# Altium PCB PCB1.PcbDoc
Units mil, origin at the board's own origin, x right, y up, seen from the top; angles counter-clockwise.
Board outline 5720 x 4000 mil, 2 copper layers (Top Layer, Bottom Layer); 32 components, 35 nets, 157 pads, 32 vias.
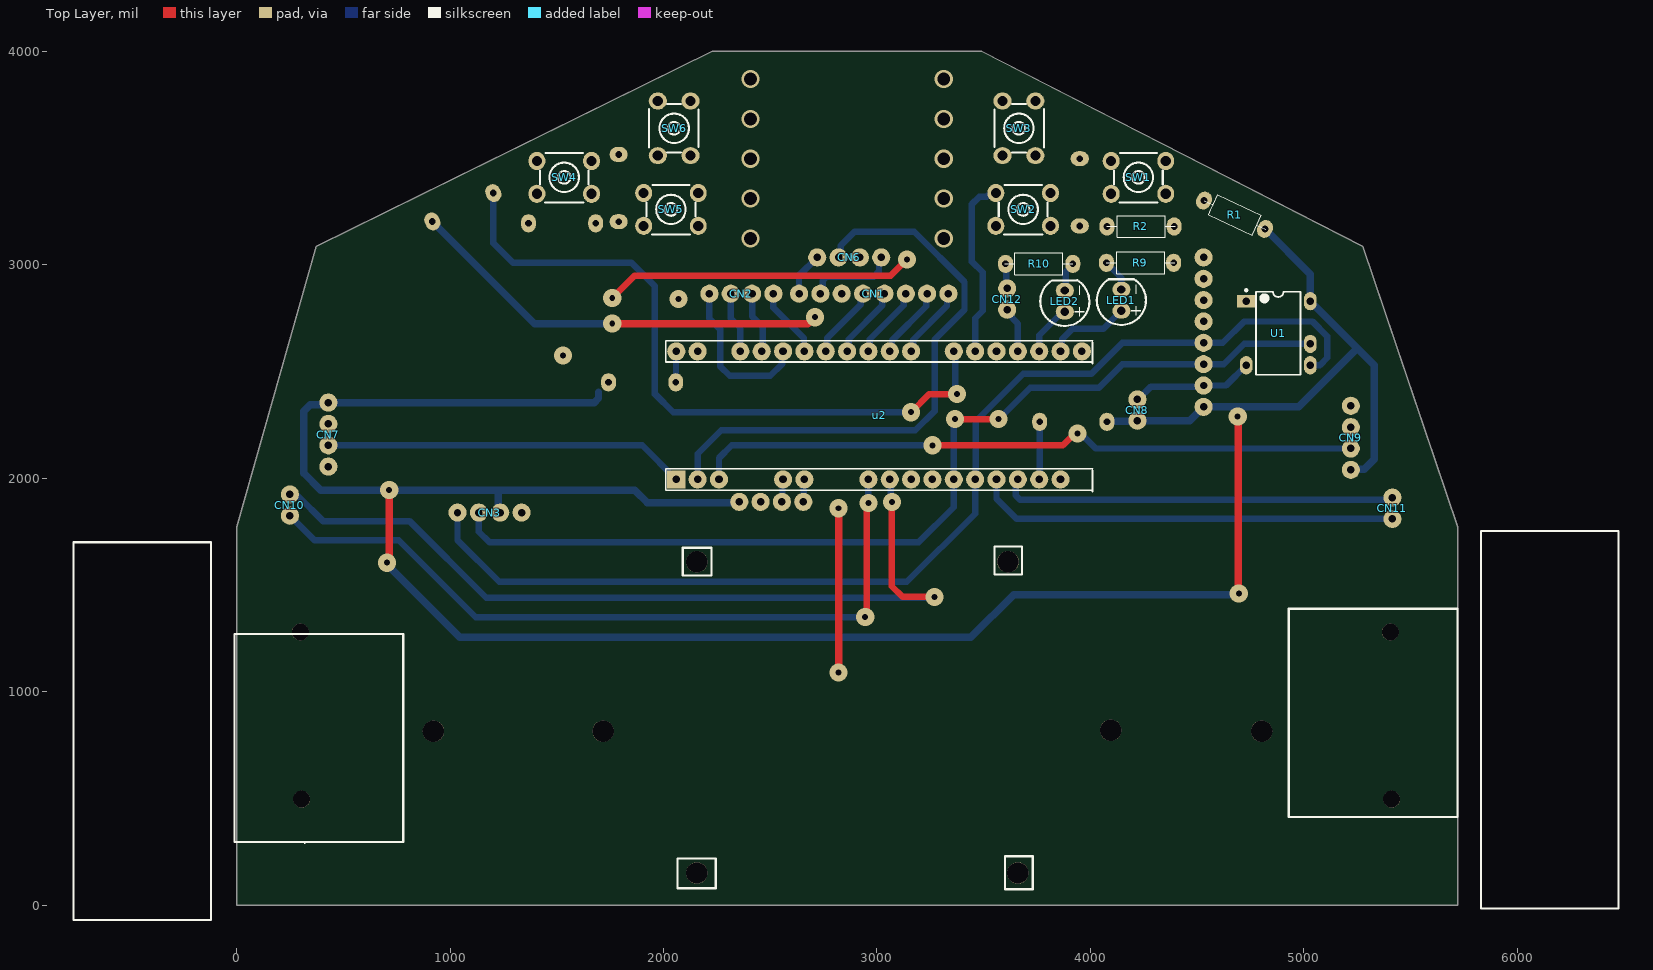
[diagram p0: Top Layer view]
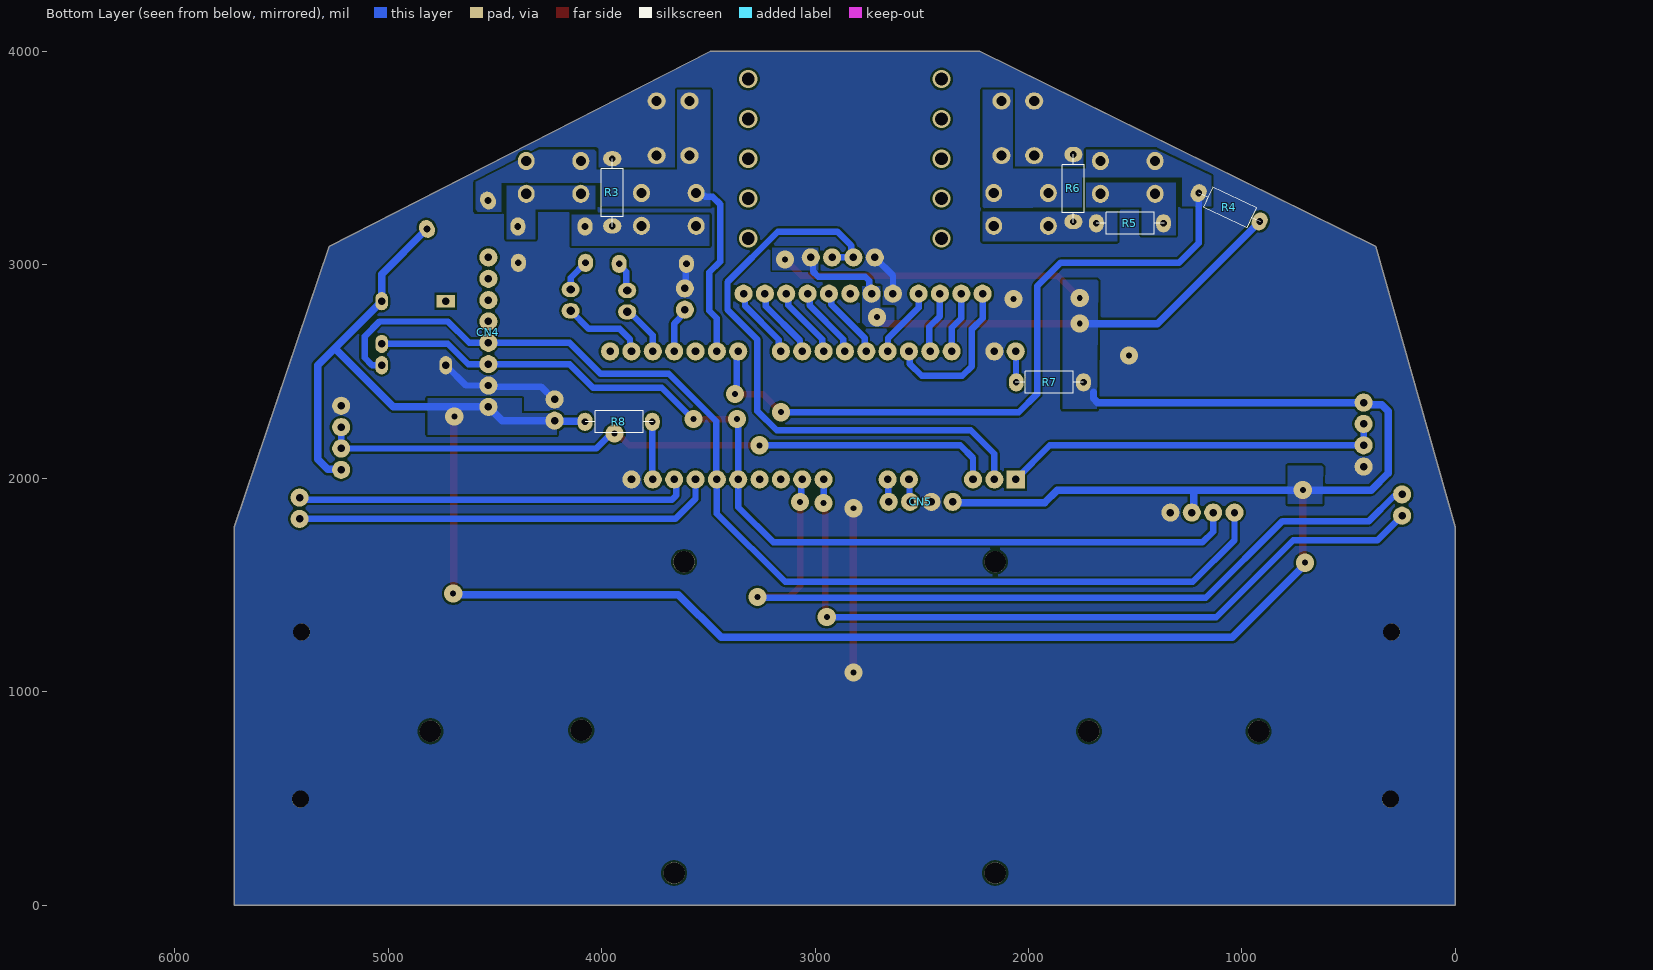
[diagram p1: Bottom Layer view, seen from below]

## Layer stack, top to bottom
Top Solder: solder mask 0.4, Solder Resist, Dk 3.5
Top Layer: signal copper 1.4
Dielectric 1: dielectric 12.6, FR-4, Dk 4.8
Bottom Layer: signal copper 1.4
Bottom Solder: solder mask 0.4, Solder Resist, Dk 3.5

## Board outline
0,0 5720,0 5720,1771.65 5275.59,3087.76 3491.65,4000 2228.35,4000 373.56,3087.76 0,1771.65

## Design rules (kind name [scope] priority, off if disabled: settings)
Clearance Clearance_1 [InNamedPolygon('GND_01')] p1: gap=10 ignorepadtopadclearanceinfootprint=FALSE
Clearance [All] p2: gap=10 ignorepadtopadclearanceinfootprint=FALSE
PolygonConnect PolygonConnect_21 [All vs IsNamedPolygon('NONET_L-01_P-001')] p1: thpad.connectstyle=Direct thpad.reliefconductorwidth=10 thpad.reliefentries=4 thpad.polygonreliefangle="90 Angle" thpad.airgapwidth=10 smdpad.connectstyle=Relief smdpad.reliefconductorwidth=10 smdpad.reliefentries=4 smdpad.polygonreliefangle="90 Angle" smdpad.airgapwidth=10 via.connectstyle=Direct via.reliefconductorwidth=10 via.reliefentries=4 via.polygonreliefangle="90 Angle" via.airgapwidth=10
PolygonConnect PolygonConnect_20 [All vs IsNamedPolygon('GND_01')] p2: thpad.connectstyle=Direct thpad.reliefconductorwidth=10 thpad.reliefentries=4 thpad.polygonreliefangle="90 Angle" thpad.airgapwidth=10 smdpad.connectstyle=Relief smdpad.reliefconductorwidth=10 smdpad.reliefentries=4 smdpad.polygonreliefangle="90 Angle" smdpad.airgapwidth=10 via.connectstyle=Direct via.reliefconductorwidth=10 via.reliefentries=4 via.polygonreliefangle="90 Angle" via.airgapwidth=10
PolygonConnect PolygonConnect_19 [All vs IsNamedPolygon('NONET_L-01_P-001')] p3: thpad.connectstyle=Direct thpad.reliefconductorwidth=10 thpad.reliefentries=4 thpad.polygonreliefangle="90 Angle" thpad.airgapwidth=10 smdpad.connectstyle=Relief smdpad.reliefconductorwidth=10 smdpad.reliefentries=4 smdpad.polygonreliefangle="90 Angle" smdpad.airgapwidth=10 via.connectstyle=Relief via.reliefconductorwidth=10 via.reliefentries=4 via.polygonreliefangle="90 Angle" via.airgapwidth=10
PolygonConnect PolygonConnect_18 [All vs IsNamedPolygon('NONET_L-01_P-001')] p4: thpad.connectstyle=Direct thpad.reliefconductorwidth=10 thpad.reliefentries=4 thpad.polygonreliefangle="90 Angle" thpad.airgapwidth=10 smdpad.connectstyle=Relief smdpad.reliefconductorwidth=10 smdpad.reliefentries=4 smdpad.polygonreliefangle="90 Angle" smdpad.airgapwidth=10 via.connectstyle=Relief via.reliefconductorwidth=10 via.reliefentries=4 via.polygonreliefangle="90 Angle" via.airgapwidth=10
PolygonConnect PolygonConnect_17 [All vs IsNamedPolygon('NONET_L-01_P-001')] p5: thpad.connectstyle=Direct thpad.reliefconductorwidth=10 thpad.reliefentries=4 thpad.polygonreliefangle="90 Angle" thpad.airgapwidth=10 smdpad.connectstyle=Relief smdpad.reliefconductorwidth=10 smdpad.reliefentries=4 smdpad.polygonreliefangle="90 Angle" smdpad.airgapwidth=10 via.connectstyle=Relief via.reliefconductorwidth=10 via.reliefentries=4 via.polygonreliefangle="90 Angle" via.airgapwidth=10
PolygonConnect PolygonConnect_16 [All vs IsNamedPolygon('NONET_L-01_P-001')] p6: thpad.connectstyle=Direct thpad.reliefconductorwidth=10 thpad.reliefentries=4 thpad.polygonreliefangle="90 Angle" thpad.airgapwidth=10 smdpad.connectstyle=Relief smdpad.reliefconductorwidth=10 smdpad.reliefentries=4 smdpad.polygonreliefangle="90 Angle" smdpad.airgapwidth=10 via.connectstyle=Relief via.reliefconductorwidth=10 via.reliefentries=4 via.polygonreliefangle="90 Angle" via.airgapwidth=10
PolygonConnect PolygonConnect_15 [All vs IsNamedPolygon('NONET_L-01_P-001')] p7: thpad.connectstyle=Direct thpad.reliefconductorwidth=10 thpad.reliefentries=4 thpad.polygonreliefangle="90 Angle" thpad.airgapwidth=10 smdpad.connectstyle=Relief smdpad.reliefconductorwidth=10 smdpad.reliefentries=4 smdpad.polygonreliefangle="90 Angle" smdpad.airgapwidth=10 via.connectstyle=Relief via.reliefconductorwidth=10 via.reliefentries=4 via.polygonreliefangle="90 Angle" via.airgapwidth=10
PolygonConnect PolygonConnect_14 [All vs IsNamedPolygon('NONET_L-01_P-001')] p8: thpad.connectstyle=Direct thpad.reliefconductorwidth=10 thpad.reliefentries=4 thpad.polygonreliefangle="90 Angle" thpad.airgapwidth=10 smdpad.connectstyle=Relief smdpad.reliefconductorwidth=10 smdpad.reliefentries=4 smdpad.polygonreliefangle="90 Angle" smdpad.airgapwidth=10 via.connectstyle=Relief via.reliefconductorwidth=10 via.reliefentries=4 via.polygonreliefangle="90 Angle" via.airgapwidth=10
PolygonConnect PolygonConnect_13 [All vs IsNamedPolygon('GND_01')] p9: thpad.connectstyle=Direct thpad.reliefconductorwidth=10 thpad.reliefentries=4 thpad.polygonreliefangle="90 Angle" thpad.airgapwidth=10 smdpad.connectstyle=Relief smdpad.reliefconductorwidth=10 smdpad.reliefentries=4 smdpad.polygonreliefangle="90 Angle" smdpad.airgapwidth=10 via.connectstyle=Relief via.reliefconductorwidth=10 via.reliefentries=4 via.polygonreliefangle="90 Angle" via.airgapwidth=10
PolygonConnect PolygonConnect_12 [All vs IsNamedPolygon('NONET_L-01_P-001')] p10: thpad.connectstyle=Direct thpad.reliefconductorwidth=10 thpad.reliefentries=4 thpad.polygonreliefangle="90 Angle" thpad.airgapwidth=10 smdpad.connectstyle=Relief smdpad.reliefconductorwidth=10 smdpad.reliefentries=4 smdpad.polygonreliefangle="90 Angle" smdpad.airgapwidth=10 via.connectstyle=Relief via.reliefconductorwidth=10 via.reliefentries=4 via.polygonreliefangle="90 Angle" via.airgapwidth=10
PolygonConnect PolygonConnect_11 [All vs IsNamedPolygon('NONET_L-01_P-001')] p11: thpad.connectstyle=Direct thpad.reliefconductorwidth=10 thpad.reliefentries=4 thpad.polygonreliefangle="90 Angle" thpad.airgapwidth=10 smdpad.connectstyle=Relief smdpad.reliefconductorwidth=10 smdpad.reliefentries=4 smdpad.polygonreliefangle="90 Angle" smdpad.airgapwidth=10 via.connectstyle=Relief via.reliefconductorwidth=10 via.reliefentries=4 via.polygonreliefangle="90 Angle" via.airgapwidth=10
PolygonConnect PolygonConnect_10 [All vs IsNamedPolygon('NONET_L-01_P-001')] p12: thpad.connectstyle=Direct thpad.reliefconductorwidth=10 thpad.reliefentries=4 thpad.polygonreliefangle="90 Angle" thpad.airgapwidth=10 smdpad.connectstyle=Relief smdpad.reliefconductorwidth=10 smdpad.reliefentries=4 smdpad.polygonreliefangle="90 Angle" smdpad.airgapwidth=10 via.connectstyle=Relief via.reliefconductorwidth=10 via.reliefentries=4 via.polygonreliefangle="90 Angle" via.airgapwidth=10
PolygonConnect PolygonConnect_9 [All vs IsNamedPolygon('NONET_L-01_P-001')] p13: thpad.connectstyle=Direct thpad.reliefconductorwidth=10 thpad.reliefentries=4 thpad.polygonreliefangle="90 Angle" thpad.airgapwidth=10 smdpad.connectstyle=Relief smdpad.reliefconductorwidth=10 smdpad.reliefentries=4 smdpad.polygonreliefangle="90 Angle" smdpad.airgapwidth=10 via.connectstyle=Relief via.reliefconductorwidth=10 via.reliefentries=4 via.polygonreliefangle="90 Angle" via.airgapwidth=10
PolygonConnect PolygonConnect_8 [All vs IsNamedPolygon('NONET_L-01_P-001')] p14: thpad.connectstyle=Direct thpad.reliefconductorwidth=10 thpad.reliefentries=4 thpad.polygonreliefangle="90 Angle" thpad.airgapwidth=10 smdpad.connectstyle=Relief smdpad.reliefconductorwidth=10 smdpad.reliefentries=4 smdpad.polygonreliefangle="90 Angle" smdpad.airgapwidth=10 via.connectstyle=Relief via.reliefconductorwidth=10 via.reliefentries=4 via.polygonreliefangle="90 Angle" via.airgapwidth=10
PolygonConnect PolygonConnect_7 [All vs IsNamedPolygon('NONET_L-01_P-001')] p15: thpad.connectstyle=Direct thpad.reliefconductorwidth=10 thpad.reliefentries=4 thpad.polygonreliefangle="90 Angle" thpad.airgapwidth=10 smdpad.connectstyle=Relief smdpad.reliefconductorwidth=10 smdpad.reliefentries=4 smdpad.polygonreliefangle="90 Angle" smdpad.airgapwidth=10 via.connectstyle=Relief via.reliefconductorwidth=10 via.reliefentries=4 via.polygonreliefangle="90 Angle" via.airgapwidth=10
PolygonConnect PolygonConnect_6 [All vs IsNamedPolygon('NONET_L-01_P-001')] p16: thpad.connectstyle=Direct thpad.reliefconductorwidth=10 thpad.reliefentries=4 thpad.polygonreliefangle="90 Angle" thpad.airgapwidth=10 smdpad.connectstyle=Relief smdpad.reliefconductorwidth=10 smdpad.reliefentries=4 smdpad.polygonreliefangle="90 Angle" smdpad.airgapwidth=10 via.connectstyle=Relief via.reliefconductorwidth=10 via.reliefentries=4 via.polygonreliefangle="90 Angle" via.airgapwidth=10
PolygonConnect PolygonConnect_5 [All vs IsNamedPolygon('NONET_L-01_P-001')] p17: thpad.connectstyle=Direct thpad.reliefconductorwidth=10 thpad.reliefentries=4 thpad.polygonreliefangle="90 Angle" thpad.airgapwidth=10 smdpad.connectstyle=Relief smdpad.reliefconductorwidth=10 smdpad.reliefentries=4 smdpad.polygonreliefangle="90 Angle" smdpad.airgapwidth=10 via.connectstyle=Relief via.reliefconductorwidth=10 via.reliefentries=4 via.polygonreliefangle="90 Angle" via.airgapwidth=10
PolygonConnect PolygonConnect_4 [All vs IsNamedPolygon('NONET_L-01_P-001')] p18: thpad.connectstyle=Direct thpad.reliefconductorwidth=10 thpad.reliefentries=4 thpad.polygonreliefangle="90 Angle" thpad.airgapwidth=10 smdpad.connectstyle=Relief smdpad.reliefconductorwidth=10 smdpad.reliefentries=4 smdpad.polygonreliefangle="90 Angle" smdpad.airgapwidth=10 via.connectstyle=Relief via.reliefconductorwidth=10 via.reliefentries=4 via.polygonreliefangle="90 Angle" via.airgapwidth=10
PolygonConnect PolygonConnect_3 [All vs IsNamedPolygon('NONET_L-01_P-001')] p19: thpad.connectstyle=Direct thpad.reliefconductorwidth=10 thpad.reliefentries=4 thpad.polygonreliefangle="90 Angle" thpad.airgapwidth=10 smdpad.connectstyle=Relief smdpad.reliefconductorwidth=10 smdpad.reliefentries=4 smdpad.polygonreliefangle="90 Angle" smdpad.airgapwidth=10 via.connectstyle=Relief via.reliefconductorwidth=10 via.reliefentries=4 via.polygonreliefangle="90 Angle" via.airgapwidth=10
PolygonConnect PolygonConnect_2 [All vs IsNamedPolygon('NONET_L-01_P-001')] p20: thpad.connectstyle=Direct thpad.reliefconductorwidth=10 thpad.reliefentries=4 thpad.polygonreliefangle="90 Angle" thpad.airgapwidth=10 smdpad.connectstyle=Relief smdpad.reliefconductorwidth=10 smdpad.reliefentries=4 smdpad.polygonreliefangle="90 Angle" smdpad.airgapwidth=10 via.connectstyle=Relief via.reliefconductorwidth=10 via.reliefentries=4 via.polygonreliefangle="90 Angle" via.airgapwidth=10
PolygonConnect PolygonConnect_1 [All vs IsNamedPolygon('NONET_L-01_P-001')] p21: thpad.connectstyle=Relief thpad.reliefconductorwidth=10 thpad.reliefentries=4 thpad.polygonreliefangle="90 Angle" thpad.airgapwidth=80 smdpad.connectstyle=Relief smdpad.reliefconductorwidth=10 smdpad.reliefentries=4 smdpad.polygonreliefangle="90 Angle" smdpad.airgapwidth=10 via.connectstyle=Relief via.reliefconductorwidth=10 via.reliefentries=4 via.polygonreliefangle="90 Angle" via.airgapwidth=10
PolygonConnect [All] p22: connectstyle=Relief reliefconductorwidth=10 reliefentries=4 polygonreliefangle="90 Angle" airgapwidth=10
RoutingVias [All] p1: holewidth=28 width=50 viastyle="Through Hole" minholewidth=28 minwidth=50 maxholewidth=28 maxwidth=50
SolderMaskExpansion [All] p1: expansion=4 istentingtop=FALSE
SupplyNets "Schematic Supply Nets_1" [InNet('GND')] p1: voltage=0.000
SupplyNets "Schematic Supply Nets" [InNet('+5')] p2: voltage=0.000
Width [All] p1: maxlimit=60 minlimit=10 preferedwidth=10 minimp=50.000000 maximp=50.000000 favimp=50.000000
30 further rules are at their usual default settings.

## Components (designator, comment, footprint, x,y, rotation, side; value= is the part's Value field where it differs from the comment)
CN1 "16CH_multiplexer" 16CH_MUX 2935,2865 r90 top
CN2 "M_Driver" M_driver 2315,2865 r270 top
CN3 "display" display 1035,1840 r90 top locked
CN4 "MPU_6050" mpu_6050 4530,2335 r0 bottom locked
CN5 "programmer" Sonar 2555,1890 r270 bottom
CN6 "Sonar" Sonar 2920,3035 r90 top
CN7 "Sonar" Sonar 430,2255 r180 top locked
CN8 "Power" power 4220,2270 r180 top
CN9 "Sonar" Sonar 5220,2140 r0 top locked
CN10 "port" power 250,1825 r180 top
CN11 "port" power 5415,1810 r180 top
CN12 "port" power 3610,2790 r180 top
LED1 "333-2SURD/S530-A3" LED-TH_BD5.9-P2.54-RD_RED 4145,2835 r270 top
LED2 "333-2SURD/S530-A3" LED-TH_BD5.9-P2.54-RD_RED 3880,2830 r270 top
R1 "10kΩ" regsistor 4675,3235 r155 top locked
R2 "10kΩ" regsistor 4235,3180 r180 top locked
R3 "10kΩ" regsistor 3950,3340 r90 bottom locked
R4 "10kΩ" regsistor 1060,3270 r25 bottom locked
R5 "10kΩ" regsistor 1525,3195 r0 bottom locked
R6 "10kΩ" regsistor 1790,3360 r90 bottom locked
R7 "10kΩ" regsistor 1900,2450 r180 bottom
R8 "10kΩ" regsistor 3920,2265 r0 bottom
R9 "10kΩ" regsistor 4232.48,3010 r180 top
R10 "10kΩ" regsistor 3760,3005 r0 top
SW1 "1825910-7" button 4225,3410 r180 top locked
SW2 "1825910-7" button 3685,3260 r180 top locked
SW3 "1825910-7" button 3665,3640 r270 top locked
SW4 "1825910-7" button 1535,3410 r180 top locked
SW5 "1825910-7" button 2035,3260 r180 top locked
SW6 "1825910-7" button 2050,3640 r90 top locked
U1 "AT24C256N" DIP-8_L9.8-W6.6-P2.54-LS7.6-BL 4880,2680 r270 top locked
u2 "STM32F401CEU6" STM32F411CE 3010,2295 r90 top locked

## Footprints (in the part's own frame and the unit in brackets; to place one, negate y for a bottom-side part, rotate by r counter-clockwise, add the part's x,y. Pads: shape width x height; smd on the part's side, far side on the other; paste and mask are expansions set on the pad)
16CH_MUX [mil]
  round 85 hole 35: 1(0,300) 2(0,200) 3(0,100) 4(0,0) 5(0,-100) 6(0,-200) 7(0,-300) 8(0,-400)
button [mm]
  oval 2x2.159 hole 1.2: 1(-3.25,-1.95) 2(3.25,-1.95) 3(3.25,1.95) 4(-3.25,1.95)
  silkscreen extent -2.9,-2.9 2.9,3
DIP-8_L9.8-W6.6-P2.54-LS7.6-BL [mil]
  rect 59.05x85 hole 35.43 paste-99999 mask+2: 1(-150,-150)
  oval 85x59.05 on Mech1 paste-99999 mask+2: 2(-50,-150) 3(50,-150) 7(-50,150)
  oval 85x59.05 hole 35.43 paste-99999 mask+2: 4(150,-150) 5(150,150) 6(50,150) 8(-150,150)
  silkscreen extent -206,-155 195,104
display [mil]
  round 85 hole 35: 1(0,0) 2(0,-100) 3(0,-200) 4(0,-300)
LED-TH_BD5.9-P2.54-RD_RED [mm]
  oval 1.8x2.159 hole 1 paste-2539.97 mask+0.05: 1(-1.27,0) 2(1.27,0)
  silkscreen extent -2.49,-2.92 2.94,2.92
M_driver [mil]
  round 85 hole 35: 1(0,200) 2(0,100) 3(0,0) 4(0,-100)
  body extent -50,-150 50,250, height 339
mpu_6050 [mil]
  round 85 hole 35: 1(0,0) 2(0,-100) 3(0,-200) 4(0,-300) 5(0,-400) 6(0,-500) 7(0,-600) 8(0,-700)
power [mil]
  round 85 hole 35: 1(0,0) 2(0,-100)
regsistor [mil]
  oval 70x85 hole 31.5: 1(-157.48,0) 2(157.48,0)
  silkscreen extent -161,-51 157,51, body extent -185,-55 185,60, height 10
Sonar [mil]
  round 85 hole 35: 1(0,200) 2(0,100) 3(0,0) 4(0,-100)
  body extent -50,-150 50,250, height 339
STM32F411CE [mil]
  rect 85x85 hole 35.43 mask+4: 1(-300,950)
  round 85 hole 35.43 mask+4: 2(-300,850) 3(-300,750) 6(-300,450) 7(-300,350) 10(-300,50) 11(-300,-50) 12(-300,-150) 13(-300,-250) 14(-300,-350) 15(-300,-450) 16(-300,-550) 17(-300,-650) 18(-300,-750) 19(-300,-850) 21(300,-950) 22(300,-850) 23(300,-750) 24(300,-650) 25(300,-550) 26(300,-450) 27(300,-350) 29(300,-150) 30(300,-50) 31(300,50) 32(300,150) 33(300,250) 34(300,350) 35(300,450) 36(300,550) 37(300,650) 39(300,850) 40(300,950)
  round 85 on Mech1 mask+4: 4(-300,650) 5(-300,550) 8(-300,250) 9(-300,150)
  round 85 on Mech13 mask+4: 20(-300,-950) 28(300,-250) 38(300,750)
  silkscreen extent -358,-1000 350,1000

## Part data
LED1 LED2: library part LED, Emitted Color=Red, Forward Current=20mA, Forward Voltage (VF)=2V, JLCPCB Part Class="Extended Part", Lens Color=红色透镜, Manufacturer=EVERLIGHT(亿光), Add into BOM=yes, Convert to PCB=yes, Datasheet=https://atta.szlcsc.com/upload/public/pdf/source/20161119/1479540195109.pdf, Device=333-2SURD/S530-A3, Dominant Wavelength=624nm, Lamp Holder Type=5mm圆形灯头, LCSC Part Name=333-2SURD/S530-A3, Luminous Intensity=200mcd, Manufacturer Part=333-2SURD/S530-A3, Peak Wavelength=632nm, Supplier=LCSC, Supplier Footprint=插件,D=5mm, Supplier Part=C87271, Symbol=333-2SURD/S530-A3, Viewing Angle=30°
R1 R2 R3 R4 R5 R6 R7 R8 R9 R10: library part reg_10k, JLCPCB Part Class="Extended Part", LCSC Part Name="金属膜电阻 10kΩ ±1% 600mW", Manufacturer=VISHAY(威世), Manufacturer Part=MBB02070C1002FCT00, Operating Temperature Range=-55℃~+155℃, Power(Watts)=600mW, Temperature Coefficient=±50ppm/℃, Tolerance=±1%, Add into BOM=yes, Convert to PCB=yes, Datasheet=https://atta.szlcsc.com/upload/public/pdf/source/20210430/B7BC0816ABBF03221EE8A99AEEE87AD9.pdf, Device=MBB02070C1002FCT00, Supplier=LCSC, Supplier Footprint=插件,D2.5xL6.5mm, Supplier Part=C1364513, Symbol=MBB02070C1002FCT00, Type="Metal Film Resistors"
SW1 SW2 SW3 SW4 SW5 SW6: library part button, Actuator/Cap Color=Red, Contact Current=50mA, JLCPCB Part Class="Extended Part", LCSC Part Name="5.99*5.99*5mm 直插 轻触开关", Manufacturer="TE Connectivity(泰科电子)", Operating Force=2.6N, Operating Temperature=-35℃~+85℃, Voltage Rating=24V, Actuator Style="Round Button", Add into BOM=yes, Circuit=SPST, Convert to PCB=yes, Datasheet=https://atta.szlcsc.com/upload/public/pdf/source/20190912/C428628_64BAA15C1B0D0A7FBB2C11BEC7714D6D.pdf, Device=1825910-7, Length=5.99mm, Life=-, Manufacturer Part=1825910-7, Mounting Type=Straight, Strike Gundam="Without bracket", Supplier=LCSC, Supplier Footprint=插件, Supplier Part=C592731, Switch Height=5mm, Symbol=1825910-7, Termination Style=PCPin, Width=5.99mm
U1: JLCPCB Part Class="Extended Part", Manufacturer=HGSEMI(华冠), Contributor=LCSC, Manufacturer Part=AT24C256N, spicePre=U, spiceSymbolName=AT24C256N, Supplier=LCSC, Supplier Part=C434602

## Free pads (board coordinates)
  round 79 hole 79: 16(298.83,1280) 16(305,497.14) 16(5411.17,497.14) 17(5405,1280)
  round 100 hole 100: 21(2156,151) 22(2156,1609) 23(3614,1609) 24(922.15,815.26) 24(1717.15,815.26) 24(3660,151) 24(4095,820) 24(4802.15,815.26) ""(3660,151)

## Via types
v1: diameter 85, hole 28, Top Layer to Bottom Layer, 22 vias
v2: diameter 85, hole 60, Top Layer to Bottom Layer, 10 vias

## Nets (pads, with @x,y where several pads share a name; then routed paths per layer and width w, separated by ;. In a path a pad name is that pad's centre, name@x,y a point inside that pad or via, vN(x,y) a via of type N, cw(c..) or ccw(c..) an arc to the next point about the centre after c; other vN are vias at no path point)
+5: CN1.2 CN3.3 CN4.1 CN5.1 CN6.4 CN7.4 CN8.1 CN9.4 R1.1 R4.1 R7.2 R8.2 U1.8 | length 15997.3
  Top Layer w30: v1(1760,2845) 1865,2950 3065,2950 v1(3140,3025)
  Top Layer w35: v1(705,1605) 705,1609.06 715,1619.06 v1(715,1945) ; v1(1760,2725) 2675.94,2725 2705.94,2755 v1(2710,2755) ; v1(4690,2290) 4692.5,2287.5 4692.5,1462.5 v1(4695,1460)
  Bottom Layer w30: v1(2710,2755) 2715,2760 v1@2715,2765 ; CN1.2 2745.52,2875.52 2745.52,2925.52 2765,2945 2985,2945 3009.48,2969.48 3009.48,3024.48 CN6.4 ; v1(3140,3025) v1@3145,3030
  Bottom Layer w35: v1(705,1605) 705,1595 1045,1255 3440,1255 3640,1455 4690,1455 v1(4695,1460) ; R4.1 1395.72,2725 v1(1760,2725) ; CN3.3 1225.43,1849.57 1225.43,1945 ; 1695.5,2404.5 1695.5,2375.5 1675,2355 CN7.4 420.43,2345.43 345.43,2345.43 315,2315 315,2025 395,1945 v1(715,1945) 1225.43,1945 ; CN5.1@2368.14,1885 1925,1885 1865,1945 1225.43,1945 ; R8.2 4079.98,2267.5 4217.5,2267.5 CN8.1 4465,2270 CN4.1 4975,2335 5250,2610 ; v1@4670,2290 v1(4690,2290) ; R1.1 5030,2956.17 U1.8 5330,2530 5330,2090 5281.87,2041.87 5221.87,2041.87 CN9.4
BUZZAR: CN12.1 u2.24 | length 215.7
  Bottom Layer w30: CN12.1 3610,2775.12 3660,2725.12 u2.24
GND: CN1.1 CN3.4 CN4.2 CN5.2 CN6.1 CN7.1 CN8.2 CN9.1 CN12.2 pad.16 pad.17 R3.2 R6.2 R9.1 R10.1 SW3.3 SW3.4 SW6.3 SW6.4 U1.4 u2.19 u2.39 | length 1674.6
  Top Layer w35: v1(2820,1090) v1(2820,1860)
  Bottom Layer w30: CN1.1 2635,2950 CN6.1 ; R10.1 3606.26,3001.26 3606.26,2893.74 CN12.2 ; CN8.2 4223.74,2370 4283.74,2430 4525,2430 CN4.2 4635,2435 U1.4
  Bottom Layer w35: v1(1530,2575) v1@1535,2575
  other v1: 2070,2840
IN1: CN2.1 u2.34 | length 330.1
  Bottom Layer w30: CN2.1 2515,2800 2658.13,2656.87 2658.13,2596.87 u2.34
IN2: CN2.2 u2.36 | length 292.8
  Bottom Layer w30: CN2.2 2415,2760 2465,2710 2465,2600 u2.36
IN3: CN2.3 u2.37 | length 288.6
  Bottom Layer w30: CN2.3 2315,2750 2360,2705 u2.37
IN4: CN2.4 u2.35 | length 754.2
  Bottom Layer w30: CN2.4 2215,2750 2265,2700 2265,2525 2310,2480 2500,2480 2555.63,2535.63 2555.63,2590.63 u2.35
LE1: CN11.1 u2.16 | length 1988.5
  Bottom Layer w30: u2.16 3560,1905 3655,1810 5405,1810 CN11.1@5415,1820
LE2: CN11.2 u2.17 | length 1860.7
  Bottom Layer w30: u2.17 3650,1985 3650,1920 3670,1900 5380.12,1900 5400.12,1920 CN11.2@5415,1920
LED1: LED1.2 u2.22 | length 393
  Bottom Layer w30: u2.22 3866.87,2601.87 3866.87,2651.87 3915,2700 4060,2700 LED1.2
LED2: LED2.2 u2.23 | length 240.6
  Bottom Layer w30: u2.23 3760,2670 3870,2780 LED2.2
NetLED1_1: LED1.1 R9.2 | length 154
  Bottom Layer w30: R9.2 4145,2940 LED1.1
NetLED2_1: LED2.1 R10.2 | length 140.5
  Bottom Layer w30: LED2.1 3883.74,2883.74 3883.74,2967.43 3917.48,3001.17 R10.2
NetR2_1: R2.1 SW1.3 SW1.4
NetR2_2: R2.2 R3.1 SW2.3 SW2.4
NetR5_1: R5.1 SW4.3 SW4.4
NetR5_2: R5.2 R6.1 SW5.3 SW5.4
NetR7_1: R7.1 u2.40 | length 146
  Bottom Layer w30: R7.1 2058.74,2451.26 2058.74,2593.74 u2.40
NetR8_1: R8.1 u2.18 | length 271
  Bottom Layer w30: u2.18 3762.52,1997.52 R8.1
RE1: CN10.1 u2.10 | length 3543
  Top Layer w30: v1(2945,1350) 2952.5,1357.5 2952.5,1877.5 v1(2960,1885)
  Bottom Layer w30: CN10.1 365,1710 760,1710 1120,1350 v1(2945,1350) ; v1(2960,1885) u2.10
RE2: CN10.2 u2.11 | length 3947.9
  Top Layer w30: v1(3070,1890) 3070,1494.88 3119.88,1445 v1(3270,1445)
  Bottom Layer w30: CN10.2 260.52,1914.48 290.6,1914.48 405.07,1800 810,1800 1170,1440 3265,1440 v1(3270,1445) ; u2.11 3065,1990 3065,1895 v1(3070,1890)
RX: CN5.4 u2.7 | length 107.1
  Bottom Layer w30: CN5.4 2657.5,1892.5 2657.5,1992.5 u2.7
S0: CN1.4 u2.33 | length 342.5
  Bottom Layer w30: u2.33 2767.38,2602.38 2767.38,2657.38 2924.48,2814.48 2924.48,2854.48 CN1.4
S1: CN1.5 u2.32 | length 342.5
  Bottom Layer w30: u2.32 2867.38,2602.38 2867.38,2652.38 3025.63,2810.63 3025.63,2855.63 CN1.5
S2: CN1.6 u2.31 | length 342.5
  Bottom Layer w30: u2.31 2966.87,2601.87 2966.87,2651.87 3125.63,2810.63 3125.63,2855.63 CN1.6
S3: CN1.7 u2.30 | length 342.5
  Bottom Layer w30: u2.30 3070.52,2605.52 3070.52,2645.52 3230.63,2805.63 3230.63,2860.63 CN1.7
SCL: CN3.2 CN4.3 U1.6 u2.14 | length 4629.6
  Top Layer w30: v1(3365,2277.5) v1(3570,2277.5)
  Bottom Layer w30: CN3.2 1135,1750 1185,1700 3195,1700 3360,1865 u2.14 3360,2272.5 v1(3365,2277.5) ; v1(3570,2277.5) 3717.5,2425 4040,2425 4150,2535 CN4.3 4625,2535 4720,2630 U1.6
SDA: CN3.1 CN4.4 U1.5 u2.15 | length 5266.5
  Bottom Layer w30: CN3.1 1035,1710 1230,1515 3140,1515 3460,1835 u2.15 3462.5,1997.5 3462.5,2267.5 3685,2490 4005,2490 4150,2635 CN4.4 4620,2635 4720,2735 5040,2735 5110,2665 5110,2565 5075.2,2530.2 5030.2,2530.2 U1.5
SIG: CN1.8 u2.29 | length 342.5
  Bottom Layer w30: u2.29 3169.37,2604.37 3169.37,2649.37 3328.13,2808.13 3328.13,2858.13 CN1.8
SW0: R1.2 SW1.1 SW1.2 SW2.1 SW2.2 SW3.1 SW3.2 u2.26 | length 858.7
  Bottom Layer w30: u2.26 3460,2750 3495,2785 3495,2965 3445,3015 3445,3285 3480,3320 3515.11,3320 3522.55,3327.44 3547.72,3327.44 SW2.2
SW1: R4.2 SW4.1 SW4.2 SW5.1 SW5.2 SW6.1 SW6.2 u2.27 | length 3272
  Top Layer w30: v1(3160,2310) 3245,2395 v1(3375,2395)
  Bottom Layer w30: R4.2 1202.73,3102.27 1295,3010 1850,3010 1960,2900 1960,2395 2045,2310 v1(3160,2310) ; u2.27 3367.5,2587.5 3367.5,2402.5 v1(3375,2395)
TRIG_ECO_1: CN9.2 CN9.3 u2.3 | length 3236.9
  Top Layer w30: v1(3260,2155) 3871.26,2155 3926.26,2210 v1(3940,2210)
  Bottom Layer w30: u2.3 2260,2095.42 2319.58,2155 v1(3260,2155) ; v1(3940,2210) 3954.88,2210 4024.88,2140 CN9.3 CN9.2
TRIG_ECO_2: CN6.2 CN6.3 u2.2 | length 2839.2
  Bottom Layer w30: u2.2 2160,2115 2270,2225 3180,2225 3270,2315 3270,2650 3410,2790 3410,2920 3175,3155 2895,3155 2830.52,3090.52 2830.52,3045.52 CN6.2 CN6.3
TRIG_ECO_3: CN7.2 CN7.3 u2.1 | length 1796.3
  Bottom Layer w30: CN7.3 CN7.2 1900,2155 u2.1
TX: CN5.3 u2.6 | length 107.1
  Bottom Layer w30: CN5.3 2557.5,1892.5 2557.5,1992.5 u2.6
pads on no net: CN1.3 CN4.5 CN4.6 CN4.7 CN4.8 U1.1 U1.2 U1.3 U1.7 u2.4 u2.5 u2.8 u2.9 u2.12 u2.13 u2.20 u2.21 u2.25 u2.28 u2.38
copper on no net:
  other v2: 2407.1,3124.29 3312.61,3124.29 2407.1,3310.71 3312.61,3310.71 2407.1,3497.14 3312.61,3497.14 2407.1,3683.57 3312.61,3683.57 2407.1,3870.61 3312.61,3870.61

## Polygon pours and split planes (outlines as drawn)
GND on Bottom Layer "GND_01" (solid, pour order 19): 0,0 5720,0 5720,1771.65 5275.59,3087.76 3491.65,4000 2228.35,4000 373.56,3087.76 0,1771.65
+5 on Bottom Layer "NONET_L-01_P-001" (solid, pour order 17): 620,2060 785,2060 785,1880 625,1880
+5 on Bottom Layer "NONET_L-01_P-001" (solid, pour order 16): 4210,2305 4210,2205 4815,2205 4815,2375 4375,2375 4375,2305
+5 on Bottom Layer "NONET_L-01_P-001" (solid, pour order 15): 1680.23,2325 1840,2325 1840,2930 1673.35,2930
+5 on Bottom Layer "NONET_L-01_P-001" (solid, pour order 14): 2695,2900.52 2695,2800 2630,2800 2630,2737.5 2657.5,2710 2760,2710 2780,2730 2780,2900.52
+5 on Bottom Layer "NONET_L-01_P-001" (solid, pour order 12): 2985,3080 2985,2975 3200,2975 3200,3080
NetR5_1 on Bottom Layer "NONET_L-01_P-001" (solid, pour order 10): 1310,3385 1730,3385 1730,3270 1470,3270 1470,3140 1310,3140 1310,3250
NetR5_2 on Bottom Layer "NONET_L-01_P-001" (solid, pour order 9): 1585,3250 2215,3250 2215,3110 1585,3110
SW1 on Bottom Layer "NONET_L-01_P-001" (solid, pour order 2): 1145,3417.12 1145,3275 1280,3275 1280,3410 1750,3410 1750,3270.2 2215,3265.46 2215,3820 2075,3820 2075,3450 1730,3450 1730,3540 1400.6,3540
SW0 on Bottom Layer "NONET_L-01_P-001" (solid, pour order 1): 3490,3265 4000,3265 4000,3385 4470,3385 4470,3250 4590,3250 4590,3388.37 4293.64,3540 4025,3540 4025,3445 3645,3445 3645,3820 3490,3820
NetR2_1 on Bottom Layer "NONET_L-01_P-001" (solid, pour order 6): 4030,3260 4310,3260 4310,3120 4445,3120 4445,3370 4030,3370
NetR2_2 on Bottom Layer "NONET_L-01_P-001" (solid, pour order 5): 3495,3235 4140,3235 4140,3090 3495,3090

## Silkscreen, mask and mechanical layers (free items; w line width, h text height)
Top Overlay:
  lines w5: 318,290.86 320.83,290.86 ; 5389.17,1394.14 5392,1394.14
  lines w10: -764.17,-69.14 -764.17,1700.86 -119.17,1700.86 -119.17,-69.14 -764.17,-69.14 ; -9.17,295.86 -9.17,1270.86 780.83,1270.86 780.83,295.86 -9.17,295.86 ; 2065,80 2245,80 2245,220 2065,220 2065,80 ; 2090,1545 2225,1545 2225,1675 2090,1675 2090,1545 ; 3550,1550 3680,1550 3680,1680 3550,1680 3550,1550 ; 3600,75 3730,75 3730,230 3600,230 3600,75 ; 4929.17,414.14 4929.17,1389.14 5719.17,1389.14 5719.17,414.14 4929.17,414.14 ; 5829.17,-15.86 5829.17,1754.14 6474.17,1754.14 6474.17,-15.86 5829.17,-15.86
Mechanical 1:
  lines w10: -1.4,-0.05 5720,-0.05 5720,1772.13 -1.4,1772.13 -1.4,-0.05 ; 373.6,1770 5275.83,1770 5275.83,3087.72 373.6,3087.72 373.6,1770 ; 2228.4,3087.48 3491.69,3087.48 3491.69,4000.05 2228.4,4000.05 2228.4,3087.48

## Dimensions
2407.1,3870.61 to 2228.4,4000.05 on Mechanical 13
3312.61,3870.61 to 3491.69,4000.05 on Mechanical 13